# Altium PCB spy0030.PcbDoc
Units mil, origin at the board's own origin, x right, y up, seen from the top; angles counter-clockwise.
Board outline 6000 x 4000 mil, 2 copper layers (Top Layer, Bottom Layer); 13 components, 10 nets, 35 pads, 0 vias.
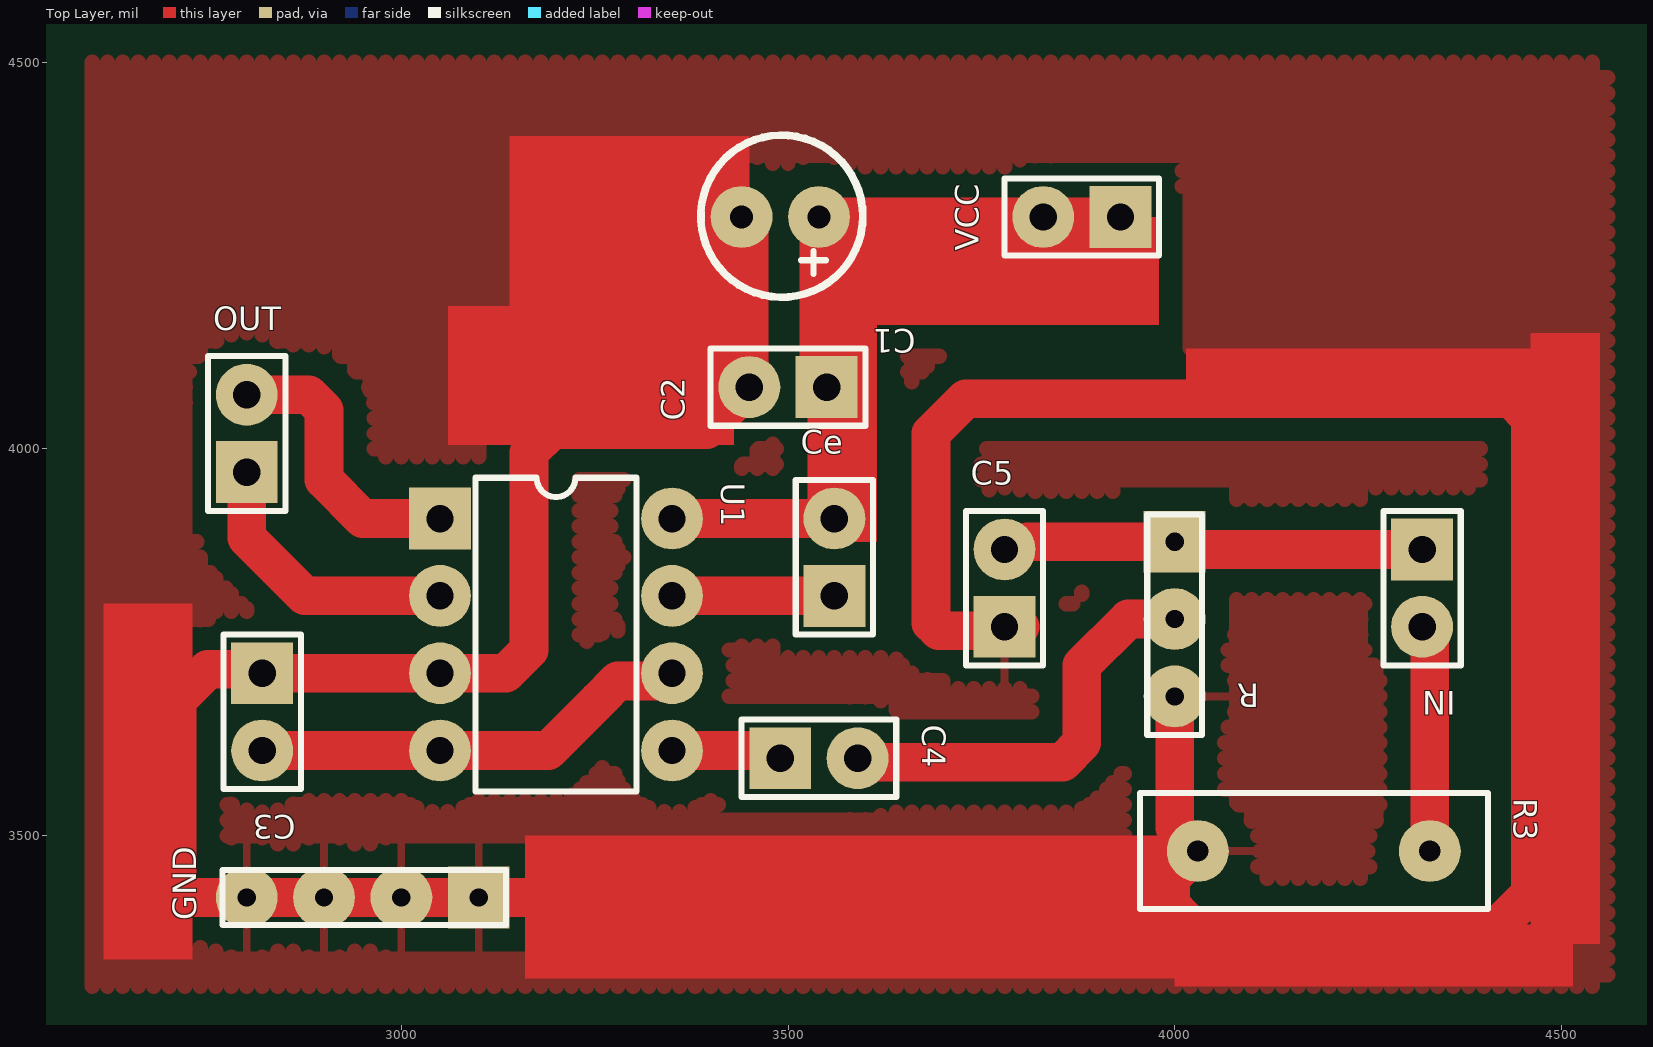
[diagram p0: Top Layer view]
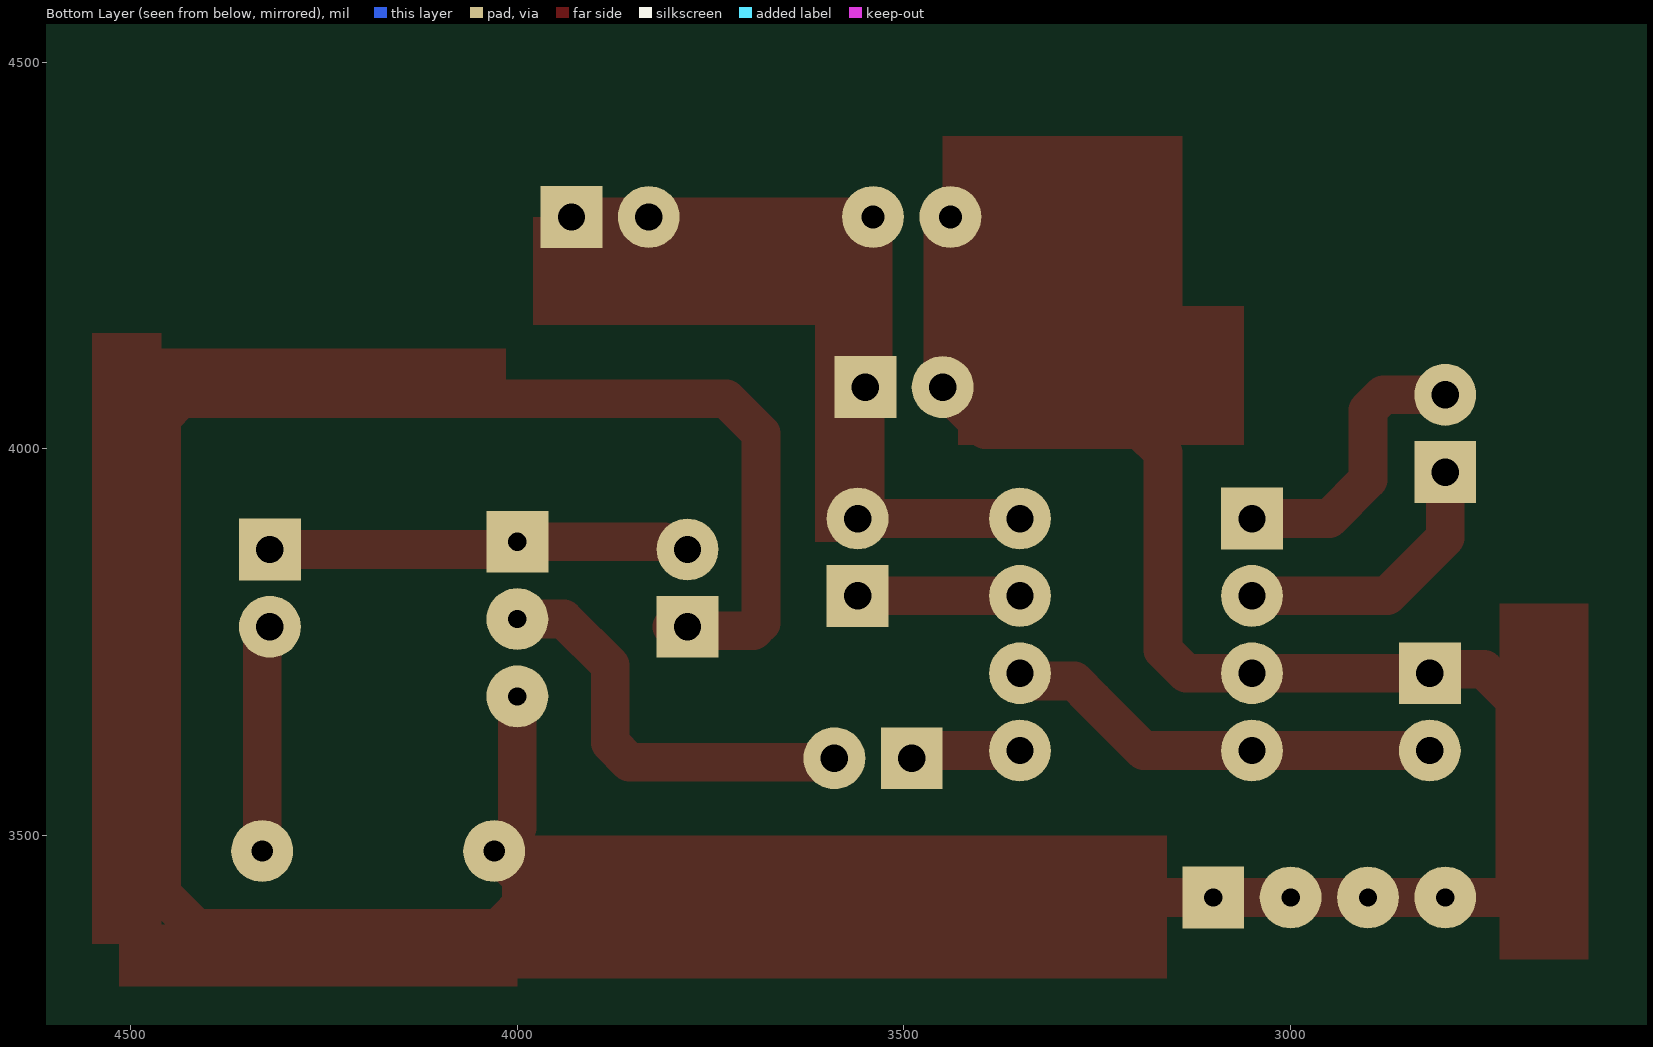
[diagram p1: Bottom Layer view, seen from below]

## Layer stack, top to bottom
Top Layer: signal copper 1.4
Dielectric: dielectric 12.6, FR-4, Dk 4.8
Bottom Layer: signal copper 1.4

## Board outline
1000,1000 7000,1000 7000,5000 1000,5000

## Design rules (kind name [scope] priority, off if disabled: settings)
Clearance [All] p1: gap=30
ComponentClearance [All] p1: gap=10 collisioncheckmode=3 verticalgap=10
PolygonConnect [All] p1: connectstyle=Relief reliefconductorwidth=10 reliefentries=4 polygonreliefangle="90 Angle"
RoomDefinition Sheet1 [InComponentClass('Sheet1')] p1: confinementstyle=ConfineIn formatcopy=TRUE lockcomponents=FALSE outline 0,0 2000,0 2000,1000 0,1000
RoutingVias [All] p1: holewidth=28 width=50 viastyle="Through Hole" minholewidth=28 minwidth=50 maxholewidth=28 maxwidth=50
SolderMaskExpansion [All] p1: expansion=4
TestPointUsage [All] p1: valid=0 allowmultiple=FALSE
Testpoint [All] p1: side=15 testpointundercomponent=TRUE minsize=40 maxsize=100 preferedsize=60 minholesize=0 maxholesize=40 preferedholesize=32 testpointgrid=1 style=1023 order=0123456789
Width [All] p1: maxlimit=50 minlimit=50 preferedwidth=50
18 further rules are at their usual default settings.

## Components (designator, comment, footprint, x,y, rotation, side; value= is the part's Value field where it differs from the comment)
C1 "100U" CAP2 3540,4300 r180 top
C2 "104" cap 3500,4080 r180 top
C3 "104" cap 2820,3660 r270 top
C4 "224" cap 3540,3600 r0 top
C5 "104" cap 3780,3820 r90 top
Ce "Header2" Header2 3560,3860 r90 top
GND "GND" Header4 3100,3420 r180 top
IN "Header2" Header2 4320,3820 r270 top
OUT "Header2" Header2 2800,4020 r90 top
R "1K" header3 4000,3880 r270 top
R3 "1K" R1 4180,3480 r0 top
U1 "SPY0030" DIP2*4 3200,3760 r270 top
VCC "Header2" Header2 3880,4300 r180 top

## Footprints (in the part's own frame and the unit in brackets; to place one, negate y for a bottom-side part, rotate by r counter-clockwise, add the part's x,y. Pads: shape width x height; smd on the part's side, far side on the other; paste and mask are expansions set on the pad)
cap [mil]
  rect 80x80 hole 35.43: 1(-50,0)
  round 80 hole 35.43: 2(50,0)
  silkscreen extent -100,-50 100,50
CAP2 [mil]
  round 80 hole 30: 1(0,0) 2(100,0)
  silkscreen extent -57,-106 153,104
DIP2*4 [mil]
  rect 80x80 hole 35.43: 1(-150,-150)
  round 80 hole 35.43: 2(-50,-150) 3(50,-150) 4(150,-150) 5(150,150) 6(50,150) 7(-50,150) 8(-150,150)
  silkscreen extent -203,-104 203,104
Header2 [mil]
  rect 80x80 hole 35.43: 1(-50,0)
  round 80 hole 35.43: 2(50,0)
  silkscreen extent -100,-50 100,50
header3 [mil]
  rect 80x80 hole 23.62: 1(0,0)
  round 80 hole 23.62: 2(100,0) 3(200,0)
  silkscreen extent -35,-35 250,35
Header4 [mil]
  rect 80x80 hole 23.62: 1(0,0)
  round 80 hole 23.62: 2(100,0) 3(200,0) 4(300,0)
  silkscreen extent -35,-35 331,35
R1 [mil]
  round 80 hole 27.56: 1(-150,0) 2(150,0)
  silkscreen extent -225,-75 225,75

## Part data
C1: library part Cap2
C2 C3 C4 C5: library part cap
GND: library part Header4
R: library part header3
R3: library part R1
U1: library part 555

## Nets (pads, with @x,y where several pads share a name; then routed paths per layer and width w, separated by ;. In a path a pad name is that pad's centre, name@x,y a point inside that pad or via, vN(x,y) a via of type N, cw(c..) or ccw(c..) an arc to the next point about the centre after c; other vN are vias at no path point)
GND: C1.2 C2.2 C3.1 C5.1 GND.1 GND.2 GND.3 GND.4 R3.1 R.3 U1.3 | length 5405.2
  Top Layer w50: C1.2 3450,4290 C2.2 3395,4025 3195,4025 3165,3995 3165,3740 3135,3710 C3.1 2815,3715 2750,3715 2710,3675 2710,3425 2715,3420 GND.1 3985,3420 4025,3380 4415,3380 4460,3425 4460,4040 4435,4065 3730,4065 3685,4020 3685,3775 3695,3765 3795,3765 C5.1@3800,3770 ; 3970,3420 R3.1 4000,3510 R.3
NetC3_2: C3.2 U1.4 U1.6 | length 578.5
  Top Layer w50: C3.2 U1.4 3190,3610 3255,3675 3280,3700 3340,3700 U1.6@3355,3715
NetC4_1: C4.1 U1.5 | length 144.1
  Top Layer w50: U1.5 3480,3610 C4.1
NetC4_2: C4.2 R.2 | length 547.3
  Top Layer w50: C4.2 3595,3595 3855,3595 3880,3620 3880,3720 3940,3780 R.2
NetC5_2: C5.2 IN.1 R.1 | length 514.1
  Top Layer w50: C5.2@3810,3880 R.1 4010,3870 IN.1
NetCe_1: Ce.1 U1.7 | length 210
  Top Layer w50: U1.7 Ce.1
NetIN_2: IN.2 R3.2 | length 294.1
  Top Layer w50: IN.2 4330,3760 R3.2
NetOUT_1: OUT.1 U1.2 | length 366.1
  Top Layer w50: OUT.1 2800,3885 2875,3810 U1.2
NetOUT_2: OUT.2 U1.1 | length 369
  Top Layer w50: OUT.2 2880,4070 2900,4050 2900,3960 2950,3910 U1.1
VCC: C1.1 C2.1 Ce.2 U1.8 VCC.1 VCC.2 | length 998.3
  Top Layer w50: U1.8 Ce.2 3550,3920 C2.1 3540,4090 C1.1 VCC.1

## Polygon pours and split planes (outlines as drawn)
GND on Top Layer "Top Layer-No Net" (hatched 90Degree grid 20 track 20): 2600,3305 4560,3305 4560,4495 4555,4500 2590,4500 2600,4490 2600,3305

## Other copper
Top Layer:
  rectangle net GND: 3060,4005 3430,4185
  rectangle net GND: 3140,4080 3450,4405
  rectangle net GND: 2615,3340 2730,3800
  rectangle net GND: 4015,4060 4535,4130
  rectangle net GND: 4460,3360 4550,4150
  rectangle net GND: 4000,3305 4515,3385
  rectangle net GND: 3160,3315.19 4020,3500
  rectangle net VCC: 3565,3880 3615,4160
  rectangle net VCC: 3540,4160 3980,4300